# Altium PCB prosthesis.PcbDoc (part 1 of 2)
Units mm, origin at the board's own origin, x right, y up, seen from the top; angles counter-clockwise.
Board outline 54.59 x 41.87 mm, 4 copper layers (Top Layer, Layer 1, Layer 2, Bottom Layer), stack 1.575 mm thick; 80 components, 84 nets, 363 pads, 186 vias.
Unrouted connection lines stored in the file: 115.
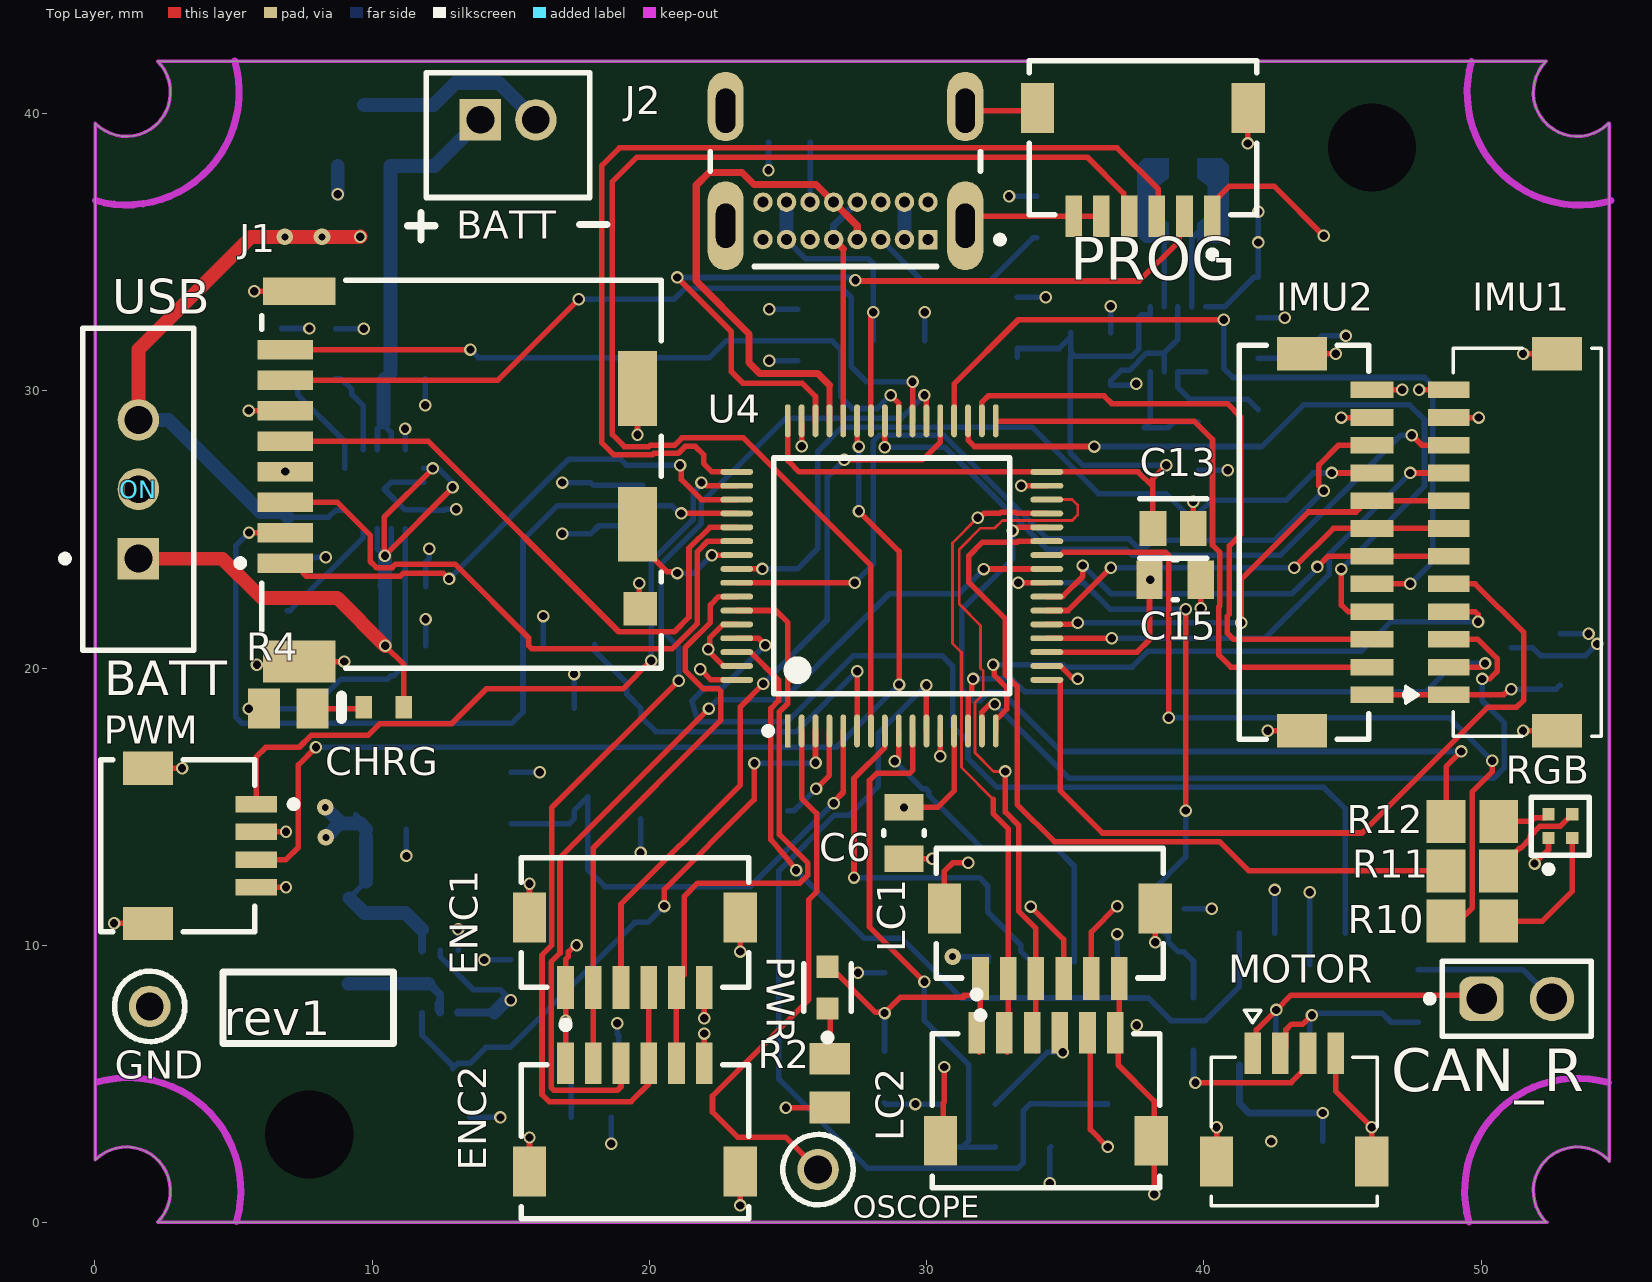
[diagram p0: Top Layer view]
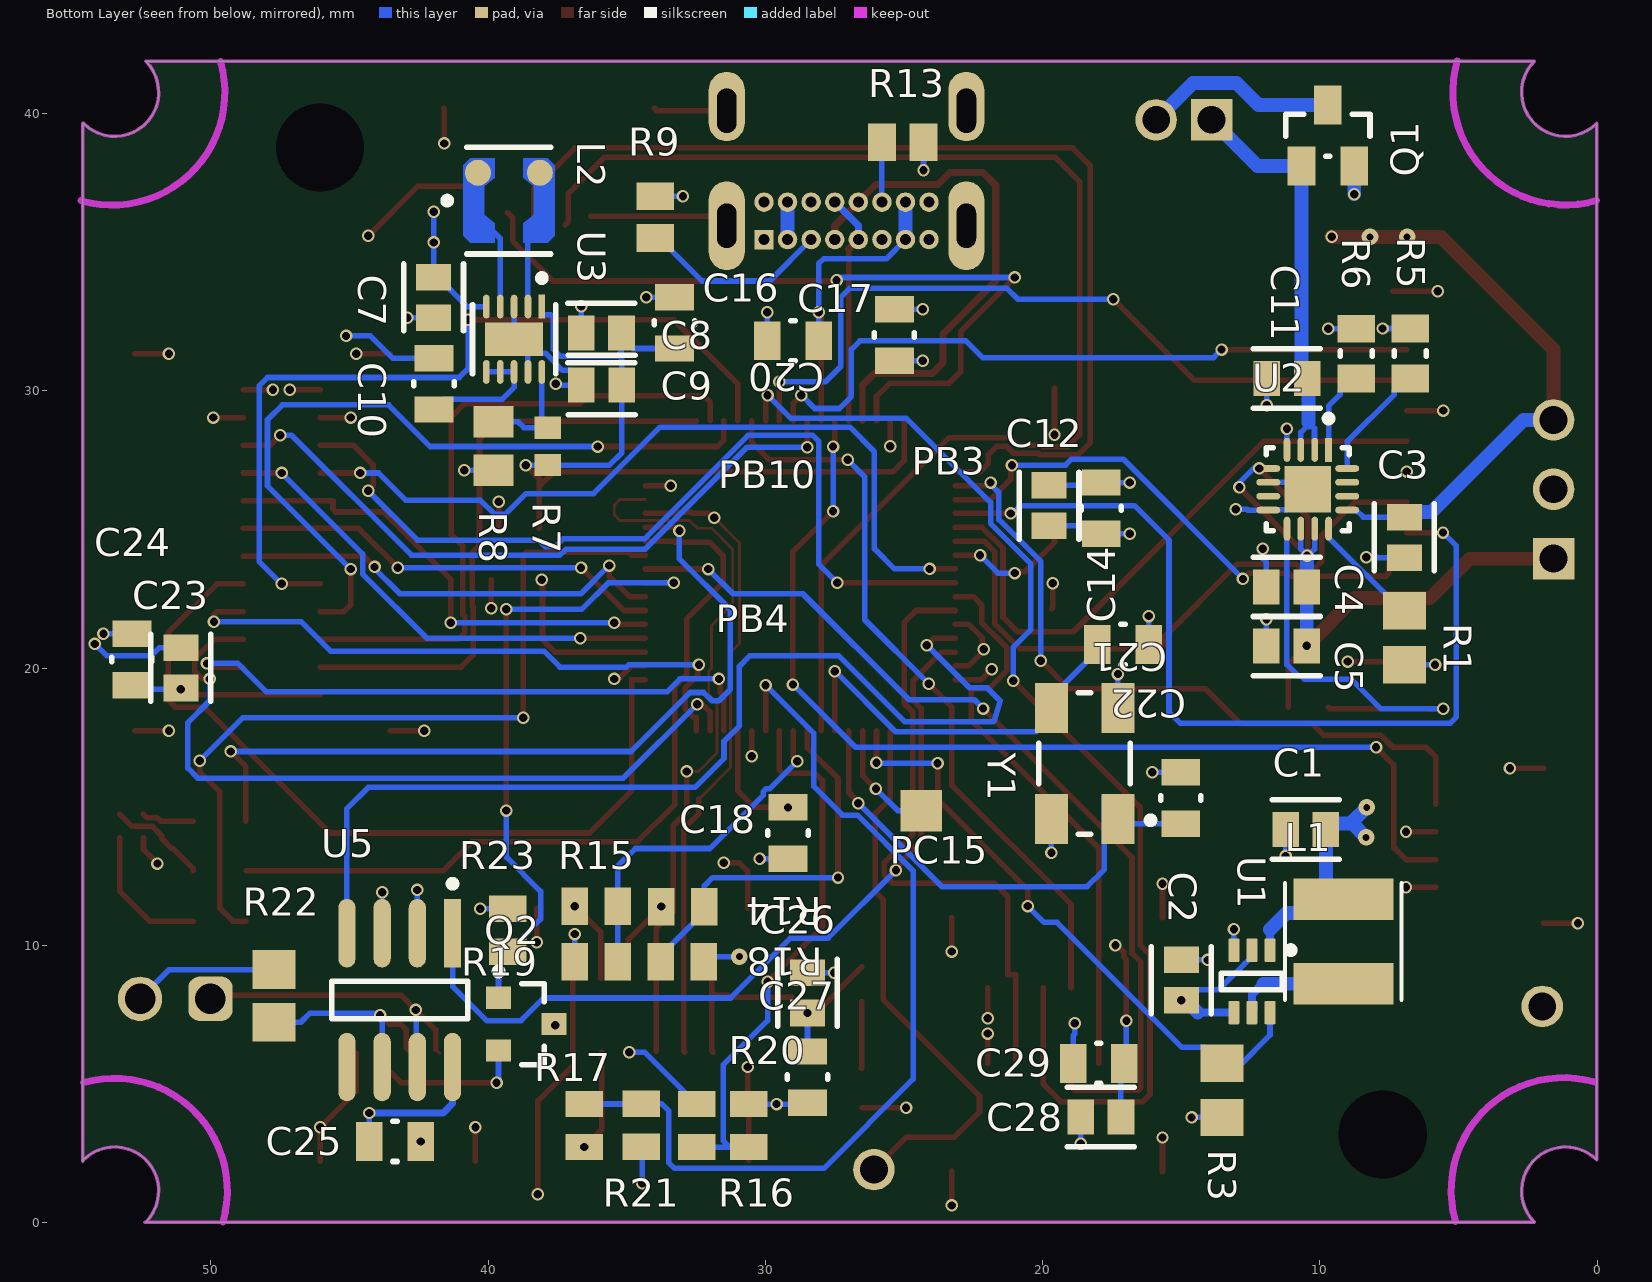
[diagram p1: Bottom Layer view, seen from below]
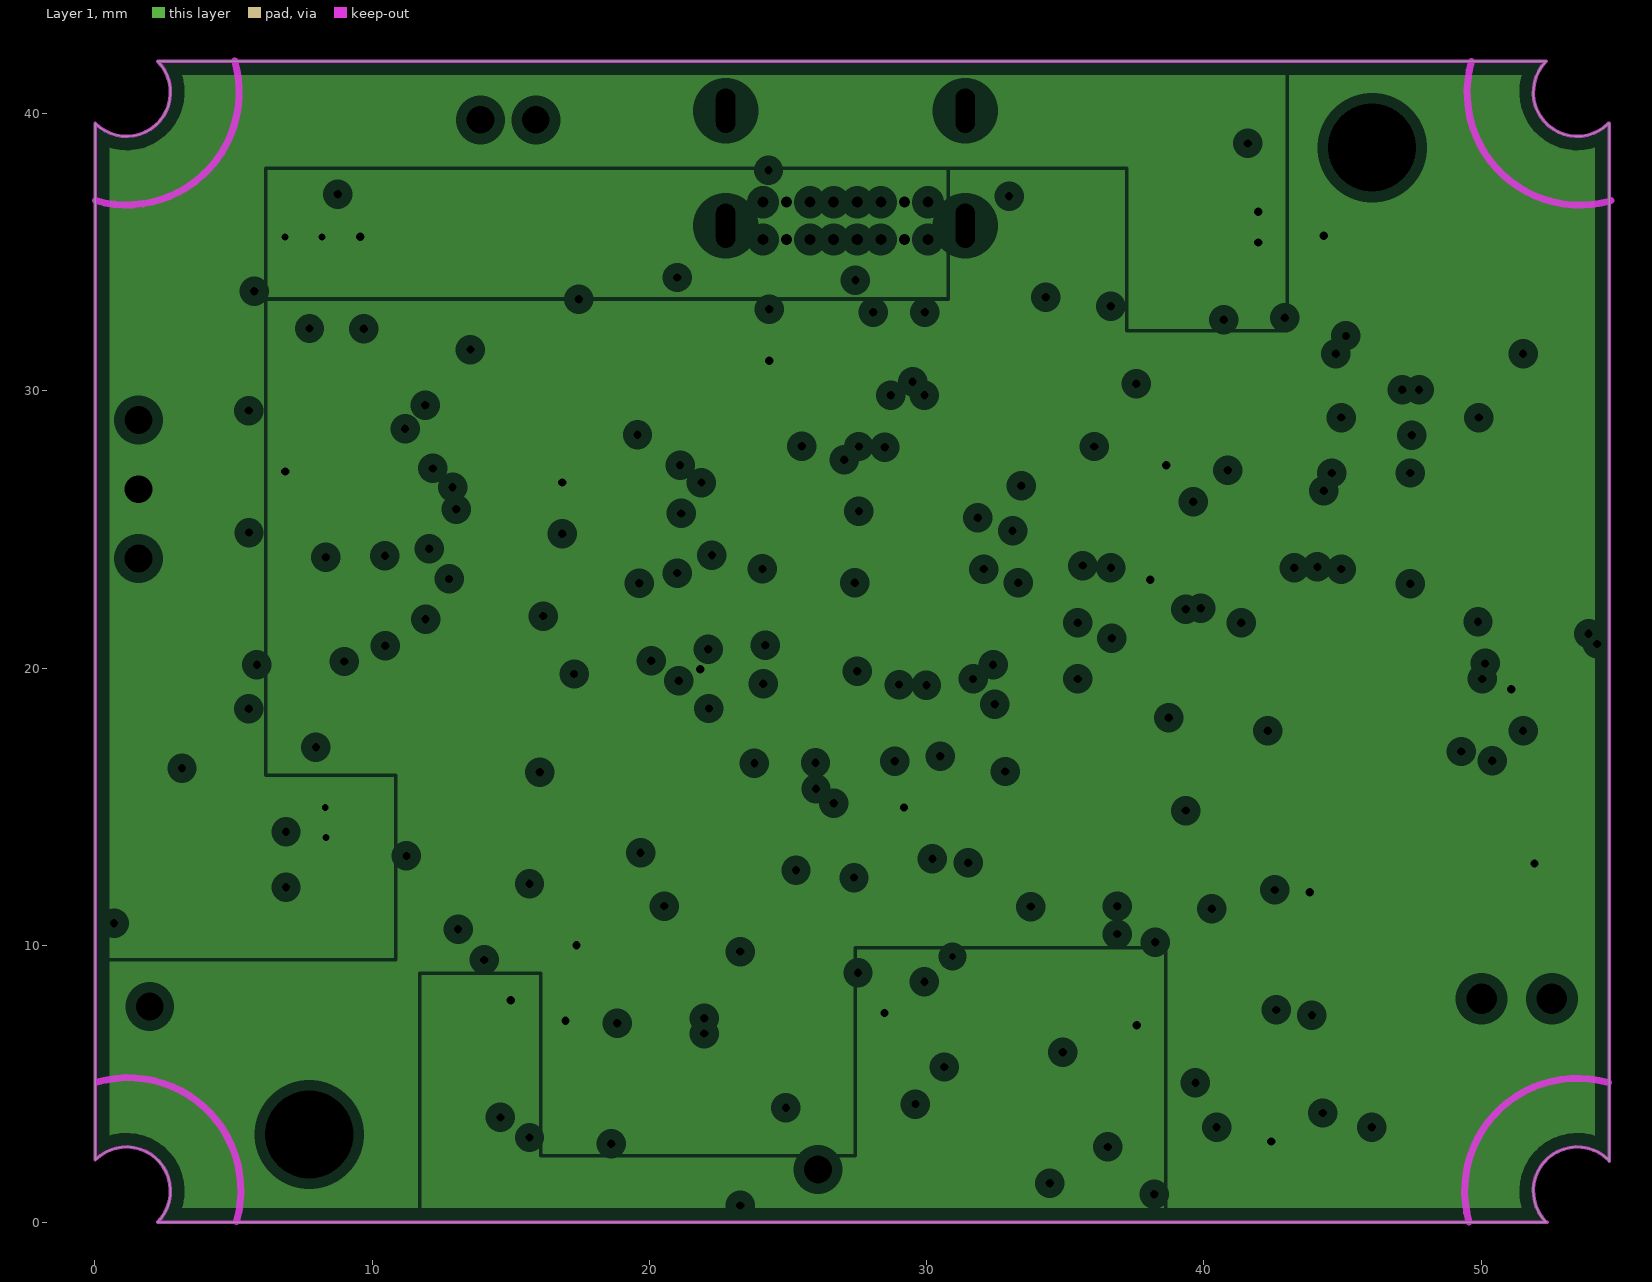
[diagram p2: Layer 1, clearances drawn from the general rule]
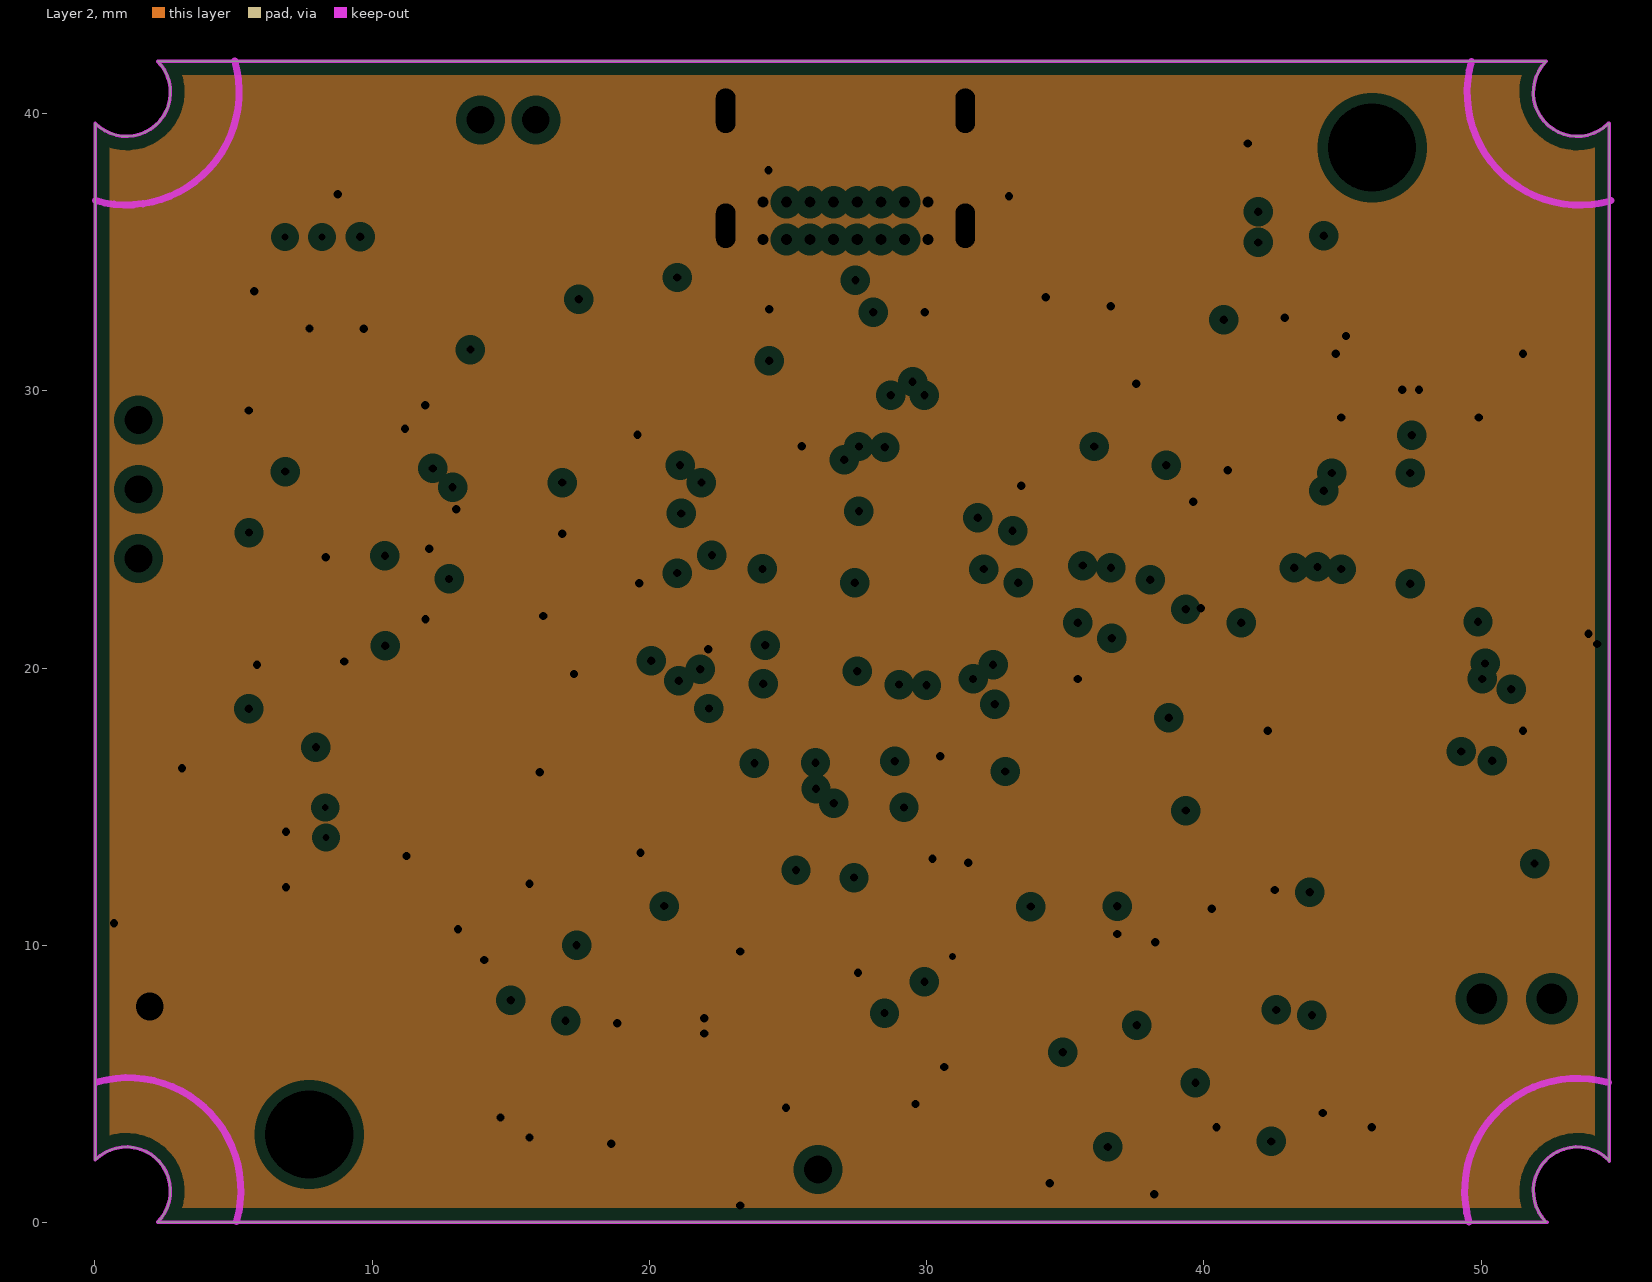
[diagram p3: Layer 2, clearances drawn from the general rule]
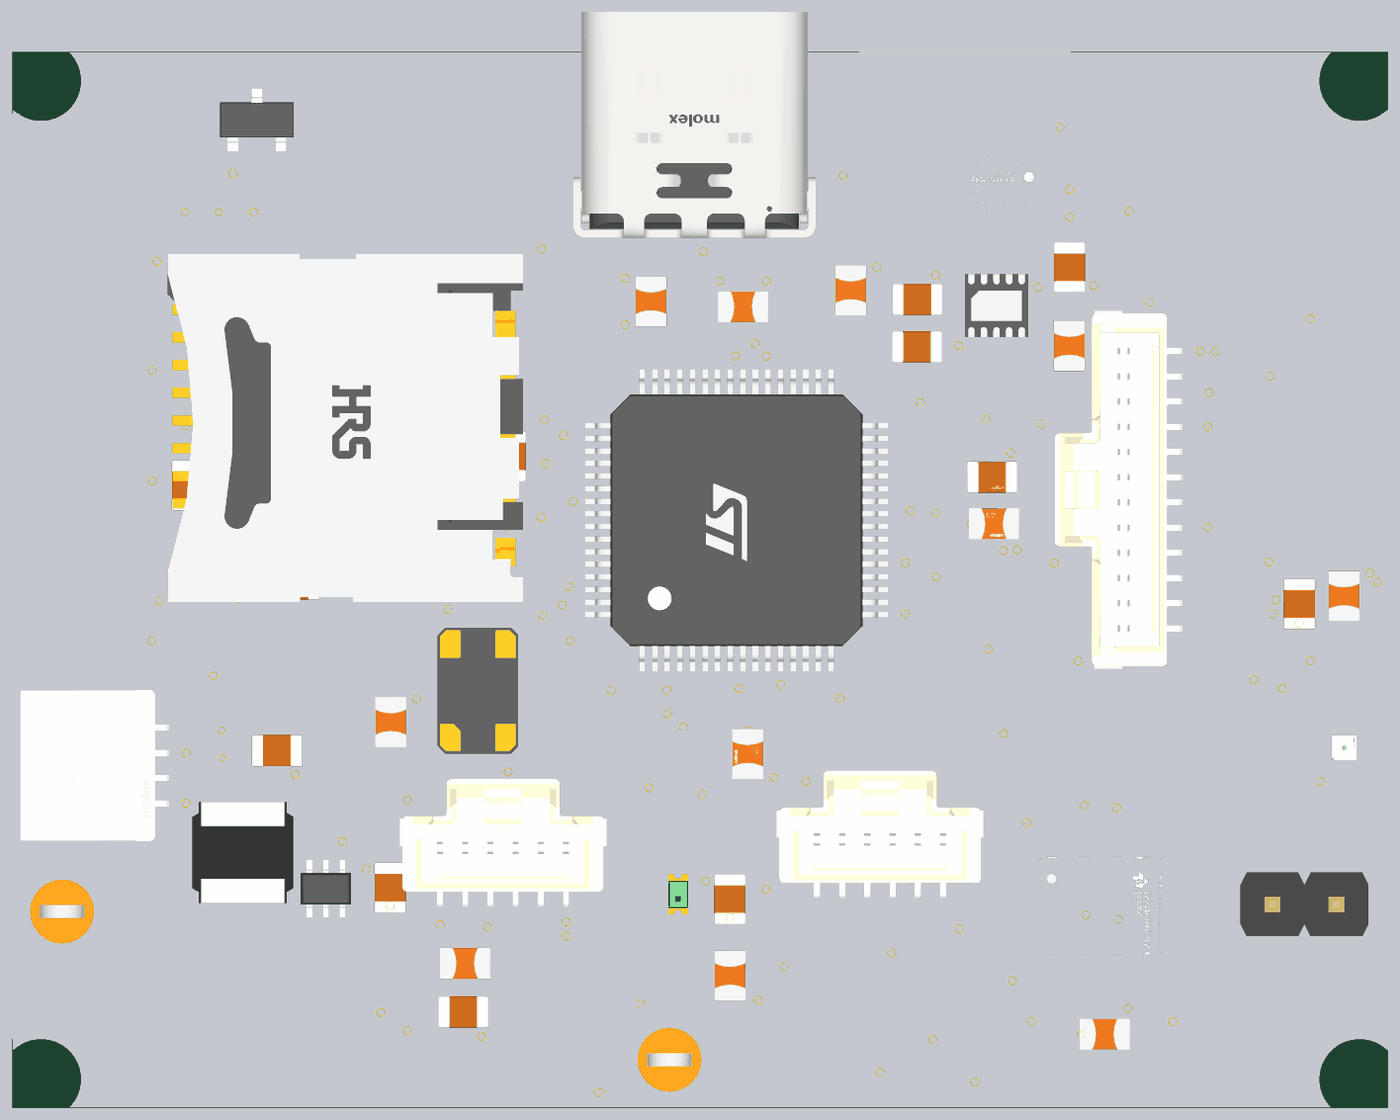
[diagram p5: 3D render of the assembled board from above, using the file's embedded part models]
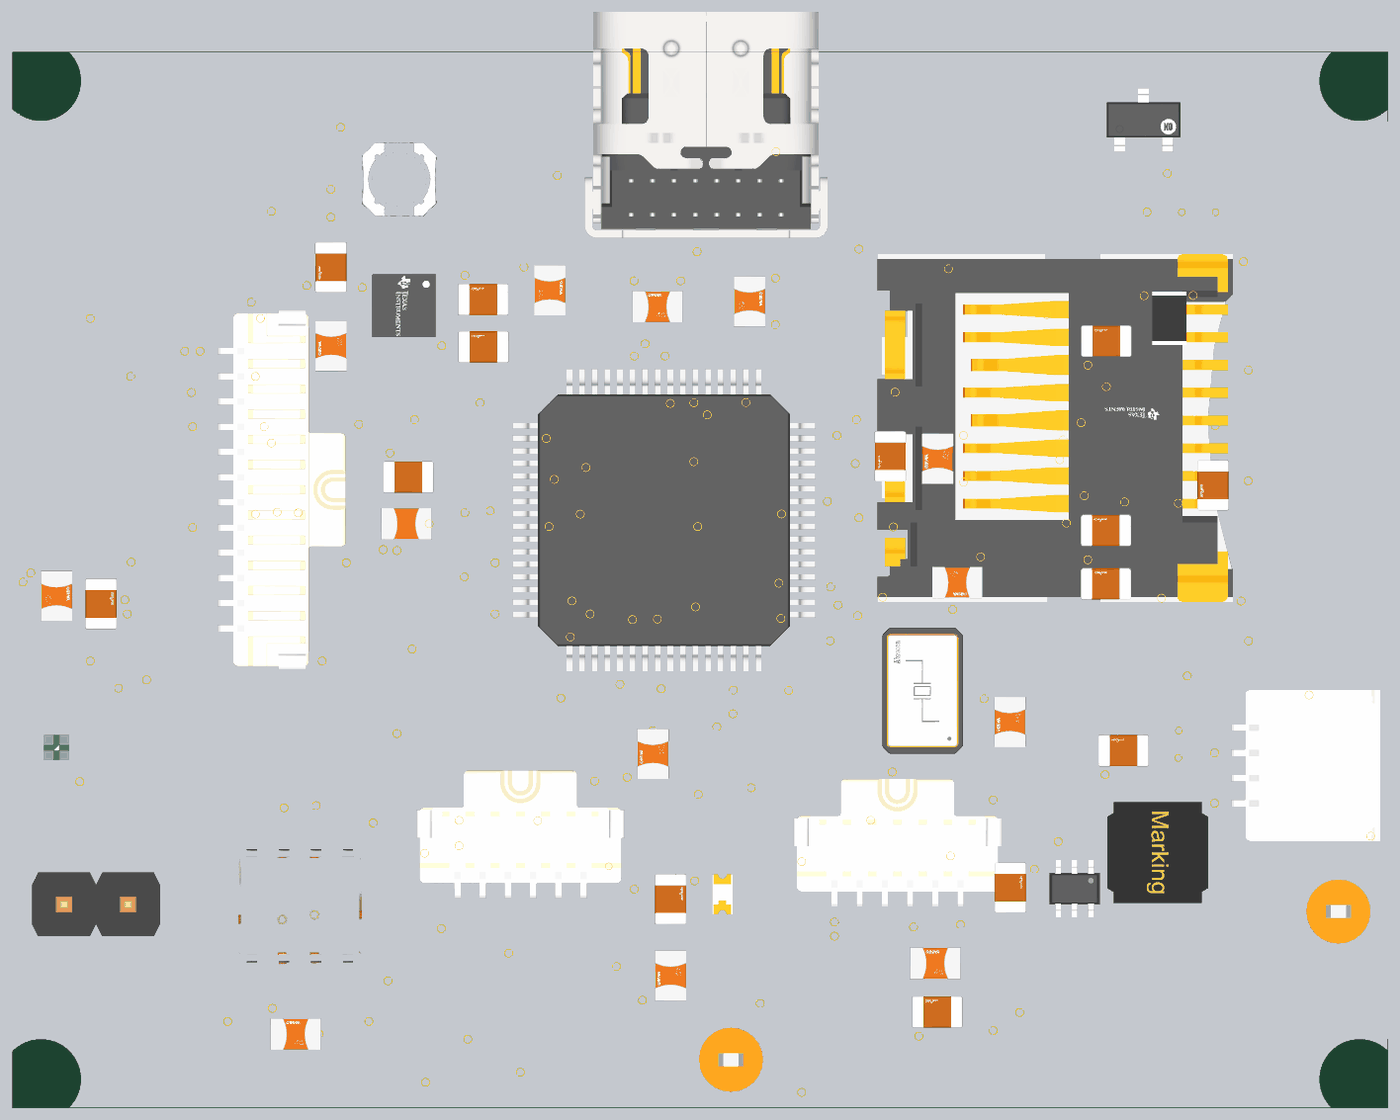
[diagram p6: 3D render of the assembled board from below, using the file's embedded part models]

## Layer stack, top to bottom
Top Solder: solder mask 0.0127, Solder Resist, Dk 3.3
Top Layer: signal copper 0.0178
Dielectric 5: prepreg 0.0711, PP-006, Dk 4.1
Dielectric 1: prepreg 0.0711, PP-006, Dk 4.1
Layer 1: plane copper 0.035, net (Multiple Nets)
Dielectric 2: prepreg 0.0711, PP-006, Dk 4.1
Dielectric1: core 1.0423, FR-4, Dk 4.3
Dielectric 3: prepreg 0.0711, PP-006, Dk 4.1
Layer 2: plane copper 0.035, net GND
Dielectric 4: prepreg 0.0711, PP-006, Dk 4.1
Dielectric 6: prepreg 0.0711, PP-006, Dk 4.1
Bottom Layer: signal copper 0.0178
Bottom Solder: solder mask 0.0127, Solder Resist, Dk 3.3

## Board outline
0.02,2.266 0.02,39.644 ccw(c1.143,40.767) 2.266,41.89 52.344,41.89 ccw(c53.467,40.767) 54.59,39.644 54.61,39.644 54.61,2.211 54.59,2.266 ccw(c53.467,1.143) 52.344,0.02 2.266,0.02 ccw(c1.143,1.143)

## Design rules (kind name [scope] priority, off if disabled: settings)
Clearance [All] p1: gap=0.08 ignorepadtopadclearanceinfootprint=TRUE
DiffPairsRouting [All] p1: maxlimit=0.254 minlimit=0.254 mostfreqgap=0.254 toplayer_minwidth=0.254 toplayer_maxwidth=0.254 toplayer_prefwidth=0.254 bottomlayer_minwidth=0.254 bottomlayer_maxwidth=0.254 bottomlayer_prefwidth=0.254 maxuncoupledlength=12.7
HoleSize [All] p1: absolutevalues=TRUE maxlimit=7.62 minlimit=0.3 maxpercent=80.000 minpercent=20.000
MinimumAnnularRing [All] p1: minimumring=0.07
MinimumSolderMaskSliver [All] p1: minsoldermaskwidth=0.05
PasteMaskExpansion [All] p1: expansion=0.254
PlaneClearance [All] p1: clearance=0.381
PlaneConnect [All] p1: pad.planeconnectstyle=Relief pad.reliefexpansion=0.508 pad.reliefentries=4 pad.reliefconductorwidth=0.254 pad.reliefairgap=0.254 via.planeconnectstyle=Direct via.reliefexpansion=0.508 via.reliefentries=4 via.reliefconductorwidth=0.254 via.reliefairgap=0.254
PolygonConnect [All] p1: thpad.connectstyle=Relief thpad.reliefconductorwidth=0.254 thpad.reliefentries=4 thpad.polygonreliefangle="90 Angle" thpad.airgapwidth=0.254 smdpad.connectstyle=Relief smdpad.reliefconductorwidth=0.254 smdpad.reliefentries=4 smdpad.polygonreliefangle="90 Angle" smdpad.airgapwidth=0.254 via.connectstyle=Direct via.reliefconductorwidth=0.254 via.reliefentries=4 via.polygonreliefangle="90 Angle" via.airgapwidth=0.254
RoutingVias [All] p1: holewidth=0.3 width=0.45 viastyle="Through Hole" minholewidth=0.3 minwidth=0.45 maxholewidth=1 maxwidth=1.5
SMDNeckDown [All] p1: percent=100.000
SilkToSolderMaskClearance SilkscreenOverComponentPads [IsPad] p1: minsilkscreentomaskgap=0.254 clearancetoexposedcopper=TRUE
SolderMaskExpansion [All] p1: expansion=0.254 istentingtop=FALSE
SupplyNets "Schematic Supply Nets_4" [InNet('GND')] p1: voltage=0.000
SupplyNets "Schematic Supply Nets_3" [InNet('Vusb')] p2: voltage=0.000
SupplyNets "Schematic Supply Nets_2" [InNet('V5')] p3: voltage=0.000
SupplyNets "Schematic Supply Nets_1" [InNet('V3.3')] p4: voltage=0.000
SupplyNets "Schematic Supply Nets" [InNet('Vsys')] p5: voltage=0.000
UnRoutedNet [All] p1: checkbadconnections=TRUE
Width [All] p1: maxlimit=0.5 minlimit=0.1 preferedwidth=0.2
22 further rules are at their usual default settings.

## Classes and differential pairs
differential pair D: +D_P -D_N

## Components (designator, comment, footprint, x,y, rotation, side; value= is the part's Value field where it differs from the comment)
BATT "B2B-PH-K-S(LF)(SN)" JST-B2B-PH-K-S_V 14.908,39.221 r0 top (schematic designator BATT1)
C1 "GRM21BR61C106KE15L" FP-GRM21B-0_1-IPC_C 10.512,14.182 r0 bottom
C2 "GRM21BR61C106KE15L" FP-GRM21B-0_1-IPC_C 15.002,8.748 r90 bottom
C3 "GRM21BR61C106KE15L" FP-GRM21B-0_1-IPC_C 6.96,24.714 r270 bottom
C4 "GRM21BR61C106KE15L" FP-GRM21B-0_1-IPC_C 11.201,22.926 r0 bottom
C5 "GRM21BR61C106KE15L" FP-GRM21B-0_1-IPC_C 11.201,20.803 r0 bottom
C6 "CC0805KRX7R7BB104" FP-CC0805-0_85-MFG 29.185,14.05 r270 top value="100 nF"
C7 "GRM21BR61C106KE15L" FP-GRM21B-0_1-IPC_C 41.962,33.368 r270 bottom
C8 "GRM21BR61C106KE15L" FP-GRM21B-0_1-IPC_C 35.917,32.088 r0 bottom
C9 "GRM21BR61C106KE15L" FP-GRM21B-0_1-IPC_C 35.907,30.208 r0 bottom
C10 "CC0805KRX7R7BB104" FP-CC0805-0_85-MFG 41.952,30.251 r270 bottom value="100 nF"
C11 "GRM21BR61C106KE15L" FP-GRM21B-0_1-IPC_C 11.193,30.439 r0 bottom
C12 "GRM21BR61C106KE15L" FP-GRM21B-0_1-IPC_C 19.765,25.86 r270 bottom
C13 "GRM21BR61C106KE15L" FP-GRM21B-0_1-IPC_C 38.89,25.04 r0 top
C14 "CC0805KRX7R7BB104" FP-CC0805-0_85-MFG 17.884,25.766 r270 bottom value="100 nF"
C15 "CC0805KRX7R7BB104" FP-CC0805-0_85-MFG 38.963,23.186 r0 top value="100 nF"
C16 "CC0805KRX7R7BB104" FP-CC0805-0_85-MFG 33.275,32.451 r90 bottom value="100 nF"
C17 "CC0805KRX7R7BB104" FP-CC0805-0_85-MFG 25.348,32.012 r90 bottom value="100 nF"
C18 "CC0805KRX7R7BB104" FP-CC0805-0_85-MFG 29.185,14.05 r270 bottom value="100 nF"
C20 "CC0805KRX7R7BB104" FP-CC0805-0_85-MFG 29.003,31.805 r0 bottom value="100 nF"
C21 "32pF" FP-CC0805-0_85-MFG 15.02,15.315 r270 bottom value="32 pF"
C22 "32pF" FP-CC0805-0_85-MFG 17.104,20.85 r180 bottom value="32 pF"
C23 "GRM21BR61C106KE15L" FP-GRM21B-0_1-IPC_C 51.084,20.008 r90 bottom
C24 "CC0805KRX7R7BB104" FP-CC0805-0_85-MFG 52.847,20.309 r90 bottom value="100 nF"
C25 "CC0805KRX7R7BB104" FP-CC0805-0_85-MFG 43.358,2.93 r0 bottom value="100 nF"
C26 "GRM21BR61C106KE15L" FP-GRM21B-0_1-IPC_C 28.481,8.288 r90 bottom
C27 "CC0805KRX7R7BB104" FP-CC0805-0_85-MFG 28.481,5.25 r270 bottom value="100 nF"
C28 "GRM21BR61C106KE15L" FP-GRM21B-0_1-IPC_C 17.903,3.808 r0 bottom
C29 "CC0805KRX7R7BB104" FP-CC0805-0_85-MFG 17.977,5.744 r0 bottom value="100 nF"
CAN_R "61300211121" 61300211121 51.283,8.075 r0 top (schematic designator J3)
CHRG "TLMS1000-GS08" VISH-TLMS1000_V 10.424,18.588 r180 top
ENC1 "501331-0607" FP-501331-0607-MFG 19.478,10.827 r180 top
ENC2 "501568-0607" FP-501568-0607-MFG 19.478,2.921 r0 top
GND "5003" KSTN-5003 1.981,7.798 r0 top (schematic designator TP1)
IMU1 "2023961207" MOLEX_2023961207 51.384,24.536 r90 top
IMU2 "501331-1207" FP-501331-1207-MFG 43.606,24.536 r270 top
J1 "DM3CS-SF" FP-DM3CS-SF-MFG 13.223,26.987 r270 top
J2 "2137160001" FP-2137160001-MFG 27.073,39.018 r180 top
L1 "74404041047" WE-LQS_4012 9.155,10.142 r270 bottom
L2 "LPS3015-152MRB" FP-LPS3015-MFG 39.25,36.859 r180 bottom
LC1 "501331-0607" FP-501331-0607-MFG 34.442,11.158 r180 top
LC2 "501568-0607" FP-501568-0607-MFG 34.303,4.03 r0 top
MOTOR "2023960407" MOLEX_2023960407 43.256,3.561 r0 top
ON "EG1218" ESWI-EG1218_V 1.575,26.449 r90 top (schematic designator ON1)
OSCOPE "5003" KSTN-5003 26.086,1.915 r0 top (schematic designator OSC)
PROG "501568-0607" FP-501568-0607-MFG 37.801,39.12 r180 top
PWM "501568-0407" FP-501568-0407-MFG 2.996,13.593 r270 top (schematic designator PWM1)
PWR "LTST-C190GKT" FP-LTST-C190GKT-MFG 26.426,8.478 r90 top
Q1 "FDN337N" FP-527AG-MFG 9.714,39.212 r90 bottom
Q2 "2N7002LT3G" ONSC-SOT-23-3-318-08_V 38.624,7.159 r180 bottom
R1 "1.18k" RESC2013X70X40ML20T20 6.948,21.095 r270 bottom
R2 "1.5k" RESC2013X70X40NL20T20 26.51,5.035 r90 top
R3 "47k" RESC2013X70X40ML20T20 13.531,4.769 r90 bottom
R4 "1.5k" RESC2013X70X40NL20T20 6.983,18.539 r0 top
R5 "1.13k" RESC2013X60X35NL10T20 6.743,31.347 r270 bottom
R6 "10k" RESC2013X60X35NL10T20 8.695,31.342 r270 bottom
R7 "1M" RESC1608X55X30NL15T15 37.843,27.994 r270 bottom
R8 "180k" RESC2013X50X40NL20T20 39.804,28.009 r90 bottom
R9 "5.1k" RESC2013X60X40LL20T25 33.973,36.263 r90 bottom
R10 "100" RESC2013X60X40ML20T25 49.686,10.875 r0 top
R11 "100" RESC2013X60X40ML20T25 49.676,12.686 r0 top
R12 "100" RESC2013X60X40ML20T25 49.684,14.476 r0 top
R13 "5.1k" RESC2013X60X40LL20T25 25.048,38.958 r180 bottom
R14 "5.6k" RESC2013X70X40LL20T20 32.978,11.401 r0 bottom
R15 "5.6k" RESC2013X70X40LL20T20 36.098,11.415 r0 bottom
R16 "5.6k" RESC2013X70X40LL20T20 32.48,3.505 r90 bottom
R17 "5.6k" RESC2013X70X40LL20T20 36.53,3.505 r270 bottom
R18 "10k" RESC2013X70X40LL20T20 33.001,9.408 r0 bottom
R19 "10k" RESC2013X70X40LL20T20 36.1,9.408 r180 bottom
R20 "10k" RESC2013X70X40LL20T20 30.597,3.502 r270 bottom
R21 "10k" RESC2013X70X40LL20T20 34.469,3.51 r90 bottom
R22 "120" RESC2013X60X40ML20T25 47.725,8.178 r270 bottom
R23 "10k" RESC2013X70X40LL20T20 39.286,10.541 r270 bottom
RGB "SML-LX0404SIUPGUSB" FP-SML-LX0404SIUPGUSB-MFG 52.852,14.298 r90 top (schematic designator RGB1)
U1 "TPS61222DCKT" DCK0006A_N 12.452,8.703 r270 bottom
U2 "BQ24074RGTR" FP-RGT0016C-IPC_B 10.439,26.449 r270 bottom
U3 "TPS63030DSKT" FP-DSK0010A-IPC_B 39.062,31.86 r270 bottom
U4 "STM32L476RGT3" FP-LQFP64-5W-IPC_C 28.743,23.327 r90 top
U5 "SN65HVD230DR" FP-D0008A-IPC_A 43.187,8.025 r270 bottom
Y1 "ABM3B-48.000MHZ-B2-T" FP-ABM3B-MFG 18.485,16.561 r90 bottom

## Footprints (in the part's own frame and the unit in brackets; to place one, negate y for a bottom-side part, rotate by r counter-clockwise, add the part's x,y. Pads: shape width x height; smd on the part's side, far side on the other; paste and mask are expansions set on the pad)
61300211121 [mm] "Pin Header, pitch 2.54 mm, THT, Vertical, single row, 2p"
  rrect50% 1.6x1.6 hole 1.1: 1(-1.27,0)
  round 1.6 hole 1.1: 2(1.27,0)
  silkscreen extent -3.26,-1.35 2.69,1.35, body extent -2.54,-1.27 2.54,1.27, height 8.57
DCK0006A_N [mm] "SOT23, 6-Leads, Body 2.15x1.4mm, Pitch 0.65mm, IPC Medium Density"
  rrect25% 0.85x0.4 smd: 1(-1.125,0.65) 2(-1.125,0) 3(-1.125,-0.65) 4(1.125,-0.65) 5(1.125,0) 6(1.125,0.65)
  silkscreen extent -1.25,-1.1 0.3,1.52, body extent -1.14,-1 1.14,1, height 0.94
ESWI-EG1218_V [mm] "THD, 3-Leads, Body 11.6x4mm, Pitch 2.5mm"
  rect 1.5x1.5 hole 1: 1(-2.5,0)
  round 1.5 hole 1: 2(0,0) 3(2.5,0)
  silkscreen extent -5.8,-2 5.8,2.77, body extent -5.8,-2 5.8,2, height 7.4
FP-527AG-MFG [mm]
  rect 1.4x1 smd paste+0 mask+0: 1(-1.1,0.95) 2(1.1,0) 3(-1.1,-0.95)
  silkscreen extent -0.76,-1.52 0.76,1.52, body extent -1.25,-1.46 1.25,1.46, height 1.12
FP-501331-0607-MFG [mm]
  rect 0.6x1.55 smd paste+0 mask+0: 1(2.5,2.35) 2(1.5,2.35) 3(0.5,2.35) 4(-0.5,2.35) 5(-1.5,2.35) 6(-2.5,2.35)
  rect 1.2x1.8 smd paste+0 mask+0: 7(-3.8,-0.175) 8(3.8,-0.175)
  silkscreen extent -4.1,-2.33 4.1,3.8, body extent -4.5,-2.43 4.5,3.22, height 0.25
FP-501331-1207-MFG [mm]
  rect 0.6x1.55 smd paste+0 mask+0: 1(5.5,2.45) 2(4.5,2.45) 3(3.5,2.45) 4(2.5,2.45) 5(1.5,2.45) 6(0.5,2.45) 7(-0.5,2.45) 8(-1.5,2.45) 9(-2.5,2.45) 10(-3.5,2.45) 11(-4.5,2.45) 12(-5.5,2.45)
  rect 1.2x1.8 smd paste+0 mask+0: 13(-6.8,-0.075) 14(6.8,-0.075)
  silkscreen extent -7.1,-2.34 7.1,3.92, body extent -7.5,-2.43 7.5,3.32, height 0.25
FP-501568-0407-MFG [mm]
  rect 0.6x1.5 smd paste+0 mask+0: 1(-1.5,2.825) 2(-0.5,2.825) 3(0.5,2.825) 4(1.5,2.825)
  rect 1.2x1.8 smd paste+0 mask+0: 5(-2.8,-1.075) 6(2.8,-1.075)
  silkscreen extent -3.1,-2.77 3.1,4.3, body extent -3.5,-2.88 3.5,3.67, height 0.25
FP-501568-0607-MFG [mm]
  rect 0.6x1.5 smd paste-1000 mask+0: 1(-2.5,2.825) 2(-1.5,2.825) 3(-0.5,2.825) 4(0.5,2.825) 5(1.5,2.825) 6(2.5,2.825)
  rect 1.2x1.8 smd paste-1000 mask+0: 7(-3.8,-1.075) 8(3.8,-1.075)
  silkscreen extent -4.1,-2.78 4.1,4.32
FP-2137160001-MFG [mm]
  rrect100% 1.3x3.2 smd paste-1000 mask+0: 1(-4.32,3.065) 2(4.32,3.065)
  rrect100% 0.7x1.6 hole 1.6 slot 0.7 at 0 deg paste-2539.97 mask+0: 1(-4.32,3.065) 2(4.32,3.065) 3(-4.32,-1.085) 4(4.32,-1.085)
  rrect100% 1.3x3.2 smd far side paste-1000 mask+0: 1(-4.32,3.065) 2(4.32,3.065)
  rrect100% 1.3x2.5 smd paste-1000 mask+0: 3(-4.32,-1.235) 4(4.32,-1.235)
  rrect100% 1.3x2.5 smd far side paste-1000 mask+0: 3(-4.32,-1.235) 4(4.32,-1.235)
  rect 0.7x0.7 hole 0.4 paste-2539.97 mask+0: A1(-2.975,3.565)
  round 0.7 hole 0.4 paste-2539.97 mask+0: A4(-2.125,3.565) A5(-1.275,3.565) A6(-0.425,3.565) A7(0.425,3.565) A8(1.275,3.565) A9(2.125,3.565) A12(2.975,3.565) B1(2.975,2.215) B4(2.125,2.215) B5(1.275,2.215) B6(0.425,2.215) B7(-0.425,2.215) B8(-1.275,2.215) B9(-2.125,2.215) B12(-2.975,2.215)
  silkscreen extent -5.7,0.39 4.87,4.53, body extent -5.07,-4.63 5.07,4.76, height 0.25
FP-ABM3B-MFG [mm]
  rect 1.8x1.2 smd paste+0 mask+0: 1(-2,-1.2) 2(2,-1.2) 3(2,1.2) 4(-2,1.2)
  silkscreen extent -2.55,-2.5 2.55,1.65, body extent -2.5,-1.6 2.5,1.6, height 1.1
FP-CC0805-0_85-MFG [mm]
  rect 0.95x1.4 smd paste+0 mask+0: 1(-0.925,0) 2(0.925,0)
  silkscreen extent -0.08,-0.73 0.07,0.73, body extent -1.6,-1.05 1.6,1.05, height 0.25
FP-D0008A-IPC_A [mm]
  rect 2.469x0.622 smd paste+0 mask+0: 1(-2.414,1.905)
  rrect100% 2.469x0.622 smd paste+0 mask+0: 2(-2.414,0.635) 3(-2.414,-0.635) 4(-2.414,-1.905) 5(2.414,-1.905) 6(2.414,-0.635) 7(2.414,0.635) 8(2.414,1.905)
  silkscreen extent -4.32,-2.45 0.68,2.45, body extent -3,-2.45 3,2.45, height 1.75
FP-DM3CS-SF-MFG [mm]
  rect 0.7x2 smd paste+0 mask+0: 1(3.2,-6.35) 2(2.1,-6.35) 3(1,-6.35) 4(-0.1,-6.35) 5(-1.2,-6.35) 6(-2.3,-6.35) 7(-3.4,-6.35) 8(-4.5,-6.35)
  rect 2.7x1.4 smd paste+0 mask+0: 9(-3.1,6.35) 10(1.8,6.35)
  rect 1.2x1.2 smd paste+0 mask+0: 11(4.85,6.45)
  rect 1x2.6 smd paste+0 mask+0: 12(-6.6,-5.85)
  rect 1.5x2.6 smd paste+0 mask+0: 13(6.75,-5.85)
  silkscreen extent -7,-8.1 7,7.2, body extent -7.2,-7.45 7.6,7.3, height 0.25
FP-DSK0010A-IPC_B [mm]
  rect 0.856x0.242 smd paste+0 mask+0: 1(-1.178,1)
  rrect100% 0.856x0.242 smd paste+0 mask+0: 2(-1.178,0.5) 3(-1.178,0) 4(-1.178,-0.5) 5(-1.178,-1) 6(1.178,-1) 7(1.178,-0.5) 8(1.178,0) 9(1.178,0.5) 10(1.178,1)
  rect 1.2x2.1 smd paste-1000 mask+0: 11(0,0)
  silkscreen extent -2.33,-1.5 1.25,1.5, body extent -1.23,-1.25 1.27,1.25, height 0.8
FP-GRM21B-0_1-IPC_C [mm]
  rect 0.958x1.262 smd paste+0 mask+0: 1(-0.727,0) 2(0.727,0)
  silkscreen extent -1.21,-1.07 1.21,1.08, body extent -1,-0.63 1,0.63, height 1.35
FP-LPS3015-MFG [mm]
  round 0.937 smd paste+0 mask+0: 1(-1.116,1.004) 2(1.116,1.004)
  Top Layer region: -1.65,0 -1.65,1.27 -1.395,1.525 -0.51,1.525 -0.51,0.825 -0.89,0.51 -0.89,-0.51 -0.51,-0.825 -0.51,-1.525 -1.395,-1.525 -1.65,-1.27 -1.65,0
  Top Layer region: 1.65,0 1.65,1.27 1.395,1.525 0.51,1.525 0.51,0.825 0.89,0.51 0.89,-0.51 0.51,-0.825 0.51,-1.525 1.395,-1.525 1.65,-1.27 1.65,0
  silkscreen extent -2.35,-1.93 1.51,1.93, body extent -1.48,-1.48 1.48,1.48, height 1.5
FP-LQFP64-5W-IPC_C [mm]
  rect 1.188x0.212 smd paste+0 mask+0: 1(-5.591,3.75)
  rrect100% 1.188x0.212 smd paste+0 mask+0: 2(-5.591,3.25) 3(-5.591,2.75) 4(-5.591,2.25) 5(-5.591,1.75) 6(-5.591,1.25) 7(-5.591,0.75) 8(-5.591,0.25) 9(-5.591,-0.25) 10(-5.591,-0.75) 11(-5.591,-1.25) 12(-5.591,-1.75) 13(-5.591,-2.25) 14(-5.591,-2.75) 15(-5.591,-3.25) 16(-5.591,-3.75) 33(5.591,-3.75) 34(5.591,-3.25) 35(5.591,-2.75) 36(5.591,-2.25) 37(5.591,-1.75) 38(5.591,-1.25) 39(5.591,-0.75) 40(5.591,-0.25) 41(5.591,0.25) 42(5.591,0.75) 43(5.591,1.25) 44(5.591,1.75) 45(5.591,2.25) 46(5.591,2.75) 47(5.591,3.25) 48(5.591,3.75)
  rrect100% 0.212x1.188 smd paste+0 mask+0: 17(-3.75,-5.591) 18(-3.25,-5.591) 19(-2.75,-5.591) 20(-2.25,-5.591) 21(-1.75,-5.591) 22(-1.25,-5.591) 23(-0.75,-5.591) 24(-0.25,-5.591) 25(0.25,-5.591) 26(0.75,-5.591) 27(1.25,-5.591) 28(1.75,-5.591) 29(2.25,-5.591) 30(2.75,-5.591) 31(3.25,-5.591) 32(3.75,-5.591) 49(3.75,5.591) 50(3.25,5.591) 51(2.75,5.591) 52(2.25,5.591) 53(1.75,5.591) 54(1.25,5.591) 55(0.75,5.591) 56(0.25,5.591) 57(-0.25,5.591) 58(-0.75,5.591) 59(-1.25,5.591) 60(-1.75,5.591) 61(-2.25,5.591) 62(-2.75,5.591) 63(-3.25,5.591) 64(-3.75,5.591)
  silkscreen extent -5.72,-4.25 4.25,4.58, body extent -6,-6 6,6, height 1.6
FP-LTST-C190GKT-MFG [mm]
  rect 0.8x0.8 smd paste+0 mask+0: 1(-0.75,0) 2(0.75,0)
  silkscreen extent -1.92,-0.85 0.85,0.85, body extent -1.25,-0.55 1.25,0.55, height 0.25
FP-RGT0016C-IPC_B [mm]
  rect 0.866x0.239 smd paste+0 mask+0: 1(-1.423,0.75)
  rrect100% 0.866x0.239 smd paste+0 mask+0: 2(-1.423,0.25) 3(-1.423,-0.25) 4(-1.423,-0.75) 9(1.423,-0.75) 10(1.423,-0.25) 11(1.423,0.25) 12(1.423,0.75)
  rrect100% 0.239x0.866 smd paste+0 mask+0: 5(-0.75,-1.423) 6(-0.25,-1.423) 7(0.25,-1.423) 8(0.75,-1.423) 13(0.75,1.423) 14(0.25,1.423) 15(-0.25,1.423) 16(-0.75,1.423)
  rect 1.68x1.68 smd paste-1000 mask+0: 17(0,0)
  silkscreen extent -2.67,-1.5 1.5,1.5, body extent -1.5,-1.5 1.5,1.5, height 1
FP-SML-LX0404SIUPGUSB-MFG [mm]
  rect 0.45x0.45 smd paste+0 mask+0: 1(-0.425,0.425) 2(0.425,0.425) 3(0.425,-0.425) 4(-0.425,-0.425)
  silkscreen extent -1.67,-1.05 1.05,1.05, body extent -0.85,-0.85 0.85,0.85, height 0.25
JST-B2B-PH-K-S_V [mm] "Connector, 2-Leads, Body 5.9x4.5mm, Pitch 2mm"
  rect 1.5x1.5 hole 1: 1(-1,0.55)
  round 1.5 hole 1: 2(1,0.55)
  silkscreen extent -2.95,-2.25 2.95,2.25, body extent -2.95,-2.25 2.95,2.25, height 6
KSTN-5003 [mm] "Test Point, Through Hole, Dia 2.54mm"
  round 1.5 hole 1: 1(0,0)
  silkscreen extent -1.27,-1.27 1.27,1.27, body extent -1.27,-1.27 1.27,1.27, height 4.57
MOLEX_2023960407 [mm]
  rect 0.6x1.5 smd mask+0.076: 1(-1.5,2.55) 2(-0.5,2.55) 3(0.5,2.55) 4(1.5,2.55)
  rect 1.2x1.8 smd mask+0.076: S1(2.8,-1.35) S2(-2.8,-1.35)
  silkscreen extent -3,-2.95 3,4.1
MOLEX_2023961207 [mm]
  rect 0.6x1.5 smd mask+0.076: 1(-5.5,2.55) 2(-4.5,2.55) 3(-3.5,2.55) 4(-2.5,2.55) 5(-1.5,2.55) 6(-0.5,2.55) 7(0.5,2.55) 8(1.5,2.55) 9(2.5,2.55) 10(3.5,2.55) 11(4.5,2.55) 12(5.5,2.55)
  rect 1.2x1.8 smd mask+0.076: S1(6.8,-1.35) S2(-6.8,-1.35)
  silkscreen extent -7,-2.95 7,4.1
ONSC-SOT-23-3-318-08_V [mm] "SOT23, 3-Leads, Body 2.92x1.3mm, Pitch 0.95mm"
  rect 0.9x0.8 smd: 1(-1,0.95) 2(-1,-0.95) 3(1,0)
  silkscreen extent -1.13,-1.46 0.65,2.02, body extent -0.65,-1.46 0.65,1.46, height 1.11
RESC1608X55X30NL15T15 [mm] "Chip Resistor, 2-Leads, Body 1.60x0.80mm, IPC Medium Density"
  rect 0.8x0.95 smd: 1(-0.675,0) 2(0.675,0)
  body extent -0.87,-0.48 0.87,0.48, height 0.55
RESC2013X50X40NL20T20 [mm] "Chip Resistor, 2-Leads, Body 2.00x1.25mm, IPC Medium Density"
  rect 1.15x1.45 smd: 1(-0.875,0) 2(0.875,0)
  body extent -1.1,-0.72 1.1,0.72, height 0.5
RESC2013X60X35NL10T20 [mm] "Chip Resistor, 2-Leads, Body 2.00x1.25mm, IPC Medium Density"
  rect 1x1.35 smd: 1(-0.9,0) 2(0.9,0)
  silkscreen extent -0.1,-0.58 0.1,0.57, body extent -1.05,-0.67 1.05,0.67, height 0.6
RESC2013X60X40LL20T25 [mm] "Chip Resistor, 2-Leads, Body 2.00x1.25mm, IPC High Density"
  rect 1x1.35 smd: 1(-0.75,0) 2(0.75,0)
  body extent -1.1,-0.72 1.1,0.72, height 0.6
RESC2013X60X40ML20T25 [mm] "Chip Resistor, 2-Leads, Body 2.00x1.25mm, IPC Low Density"
  rect 1.4x1.55 smd: 1(-0.95,0) 2(0.95,0)
  body extent -1.1,-0.72 1.1,0.72, height 0.6
RESC2013X70X40LL20T20 [mm] "Chip Resistor, 2-Leads, Body 2.00x1.25mm, IPC High Density"
  rect 0.95x1.35 smd: 1(-0.775,0) 2(0.775,0)
  body extent -1.1,-0.72 1.1,0.72, height 0.7
RESC2013X70X40ML20T20 [mm] "Chip Resistor, 2-Leads, Body 2.00x1.25mm, IPC Low Density"
  rect 1.35x1.55 smd: 1(-0.975,0) 2(0.975,0)
  body extent -1.1,-0.72 1.1,0.72, height 0.7
RESC2013X70X40NL20T20 [mm] "Chip Resistor, 2-Leads, Body 2.00x1.25mm, IPC Medium Density"
  rect 1.15x1.45 smd: 1(-0.875,0) 2(0.875,0)
  body extent -1.1,-0.72 1.1,0.72, height 0.7
VISH-TLMS1000_V [mm] "SMD, 2-Leads, Body 0.8x1.6mm"
  rect 0.6x0.8 smd: 1(-0.725,0) 2(0.725,0)
  silkscreen extent 1.52,-0.4 1.52,0.4, body extent -0.8,-0.4 0.8,0.4, height 0.65
WE-LQS_4012 [mm] "SMD Power Inductor, 2-Leads, body 4x4mm"
  rect 1.5x3.6 smd: 1(-1.525,0) 2(1.525,0)
  silkscreen extent -2.1,-2.1 2.1,2.1, body extent -2,-2 2,2, height 1.19

## Part data
BATT: library part CMP-2000-05162-1, "Male Header, Pitch 2 mm, 1 x 2 Position, Height 6 mm, Tail Length 3.4 mm, -25 to 85 degC, RoHS, Bulk", Manufacturer=JST, Datasheet URL=http://datasheet.octopart.com/B2B-PH-K-S%28LF%29%28SN%29-JST-datasheet-8324864.pdf, Datasheet Version=Nov-08, Manufacturer URL=http://www.jst.com/home2.html, No of Positions=2, Pitch=2mm, Style/Orientation=StraightHeader/Plug, Termination=Crimp, Type=ShroudedHeader
C1 C2 C3 C4 C5 C7 C8 C9 C11 C12 C13 C23 C26 C28: library part CMP-2007-03453-2, "Chip Multilayer Ceramic Capacitors for General Purpose, 0805, 10uF, X5R, 15%, 10%, 16V", Capacitance=10uF, Case Code (Imperial)=0805, Case Code (Metric)=2012, Dielectric=X5R, Max Operating Temperature=85°C, Min Operating Temperature=-55°C, Package Quantity=1, Tolerance=10%, Voltage=16V, Case/Package=0805, Depth=1.25mm, Height=1.25mm, Lead Free="Lead Free", Length=2mm, Material=Ceramic, Mount="Surface Mount", Packaging="Tape and Reel", Radiation Hardening=No, REACH SVHC="No SVHC", Termination=SMD/SMT, Thickness=0.053inch, Voltage Rating=16V, Voltage Rating (DC)=16V, Width=1.25mm
C6 C10 C14 C15 C16 C17 C18 C20 C24 C25 C27 C29: library part CMP-1036-04402-6, "CAP CER 0.1UF 16V X7R 0805", Capacitance="100 nF", Manufacturer=Yageo, Package=CC0805-0.85, Temperature="-30°C to +85°C", Temperature Characteristic=X7R, Temperature Range High=+85°C, Temperature Range Low=-30°C, Tolerance=0.1, Voltage Rating="16 V", Automotive=No, Category=Cap, ComponentLink2Description=Datasheet, ComponentLink2URL=http://www.yageo.com/documents/recent/UPY-GPHC_Y5V_6.3V-to-50V_8.pdf, Device Class L1="Passive Components", Device Class L2=Capacitors, Device Class L3="Ceramic Capacitors", Digikey Description="CAP CER 0.1UF 16V X7R 0805", Footprint Url=http://www.yageo.com/exep/pages/download/literatures/UPY-C_GEN_24.pdf, Height=0.95mm, Ipc Land Pattern Name=CAPC200125X85, Lead Free=Yes, Manufacturer Part Number=CC0805KRX7R7BB104, Material=Ceramic, Mouser Description="Multilayer Ceramic Capacitors MLCC - SMD/SMT 100nF 16V X7R 10%", Octopart=https://octopart.com/cc0805krx7r7bb104-yageo-39467769, RoHS=TRUE
C21 C22: library part CMP-1036-04402-6, "CAP CER 32pF 16V X7R 0805", Capacitance="100 nF", Manufacturer=Yageo, Manufacturer Part Number=CC0805KRX7R7BB104, Package=CC0805-0.85, Temperature="-30°C to +85°C", Temperature Characteristic=X7R, Temperature Range High=+85°C, Temperature Range Low=-30°C, Tolerance=0.1, Voltage Rating="16 V", Automotive=No, Category=Cap, ComponentLink2Description=Datasheet, ComponentLink2URL=http://www.yageo.com/documents/recent/UPY-GPHC_Y5V_6.3V-to-50V_8.pdf, Device Class L1="Passive Components", Device Class L2=Capacitors, Device Class L3="Ceramic Capacitors", Digikey Description="CAP CER 0.1UF 16V X7R 0805", Footprint Url=http://www.yageo.com/exep/pages/download/literatures/UPY-C_GEN_24.pdf, Height=0.95mm, Ipc Land Pattern Name=CAPC200125X85, Lead Free=Yes, Material=Ceramic, Mouser Description="Multilayer Ceramic Capacitors MLCC - SMD/SMT 100nF 16V X7R 10%", Octopart=https://octopart.com/cc0805krx7r7bb104-yageo-39467769, RoHS=TRUE
CAN_R: library part CMP-1712-00002-6, Color=Black, Contact Resistance=20mΩ, Current Rating=3A, Max Operating Temperature=125°C, Min Operating Temperature=-40°C, Operating Supply Voltage=250V, Connector Type="Male Pin", Contact Gender=Male, Contact Material=Copper, Contact Mating Length=5.9944mm, Contact Plating=Gold, Gender=Male, Height=8.94mm, Housing Material=PBT, Lead Free="Lead Free", Lead Pitch=2.54mm, Mount="Through Hole", NexarPartId=20081794, Number of Contacts=2, Number of Pins=2, Number of Positions=2, Number of Rows=1, Orientation=Vertical, Packaging=Bulk, Pitch=2.54mm, REACH SVHC="No SVHC", RoHS=Compliant, Termination="Through Hole", Voltage Rating=250V
CHRG: library part CMP-2000-07254-1, "Low Current LED, 40 mW, 1.8 V, -40 to 100 degC, 2-Pin SMD (0603), RoHS, Tape and Reel", Forward Current If=2mA, Forward Voltage=1.8V, LED Colour=Red, Manufacturer=Vishay, Package Description="2-Pin Surface Mount Device, Body 1.6 x 0.8 mm", Package Reference=TLMS1000, Automotive Qualification Standard=AEC-Q100, Bulb Size=1.6mmx0.8mm, Datasheet URL=https://datasheet.ciiva.com/5798/1698881-5798337.pdf, Datasheet Version="Rev. 1.7, 02/2011", LED Mounting=SMD, Lens Shape=Rectangular, Luminous Intensity=4mcd, Manufacturer URL=http://www.vishay.com/, Mounting Technology=SurfaceMount, MSL=MSL2-1year, Packaging=CutTape, Product Range=-, SVHC=ToBeAdvised, Viewing Angle=80°, Wavelength Typ=636nm
ENC1 LC1: library part CMP-04776-000269-1, "CONN HEADER SMD 6POS 1MM", Color=Natural, Contact Resistance=20mR, Current Rating=1A, Max Operating Temperature=85°C, Max Voltage Rating (AC)=50V, Max Voltage Rating (DC)=5.05kV, Min Operating Temperature=-40°C, Package Quantity=1100, Connector Type="Male Pin", Contact Gender=Male, Contact Material=Bronze, Contact Plating=Tin, Contact Type="Male Pin", Depth=5.07mm, Fastening Type=Detent, Gender=Male, Glow Wire Compliant=Non-compliant, Housing Color=Natural, Housing Material=Nylon, Lead Free="Lead Free", Mount="Surface Mount", Number of Circuits=6, Number of Contacts=6, Number of Positions=6, Number of Rows=1, Orientation=Vertical, Packaging="Tape and Reel", Pitch=1mm, Radiation Hardening=No, RoHS Compliant=Yes, Series=501331, Termination=Solder, Voltage Rating=50V, Voltage Rating (AC)=50V
ENC2 LC2 PROG: library part CMP-04776-000027-1, "CONN HEADER SMD R/A 6POS 1MM", Ambient Temperature Range High=+105°C, Ambient Temperature Range Low=-40°C, Current Rating=1A, Manufacturer=Molex, Temperature="-40°C to +105°C", Voltage Rating=50V, Automotive=No, Category=Conn, ComponentLink2Description=Datasheet, ComponentLink2URL=https://www.molex.com/webdocs/datasheets/pdf/en-us/5015680607_PCB_HEADERS.pdf, Conn Gender=Male, Conn Orientation="Right Angle", Contact Material=Tin,Nickel, Device Class L1=Connectors, Device Class L2="Headers and Wire Housings", Device Class L3=unset, Digikey Description="CONN HEADER SMD R/A 6POS 1MM", Footprint Url=https://www.molex.com/pdm_docs/sd/5015680607_sd.pdf, Height=4.9mm, Lead Free=Yes, Manufacturer Part Number=501568-0607, Mouser Description="Headers & Wire Housings 1.0 WtB 6Ckt R/AWaferAssyEmbsTpPk", Number of Contacts=6, Number of Rows=1, Octopart=https://octopart.com/501568-0607-molex-1389391, Package=501568-0607, Pitch=1mm, RoHS=TRUE, Standoff Height=0.1mm, Temperature Range High=+105°C, Temperature Range Low=-40°C
GND OSCOPE: library part CMP-1672-00009-1, "Test Point, Orange, 1-Pin THD, RoHS", Forward Current="3 A", Forward Voltage="1.08 V", Max Operating Temperature="150 degC", Max Surge Current="80 A", Min Operating Temperature="-65 degC", Package Quantity=500, Peak Reverse Current="600 uA", ComponentLink1Description="Manufacturer URL", ComponentLink1URL=http://www.keyelco.com/, ComponentLink2Description=Datasheet, ComponentLink2URL=http://keyelco.com/userAssets/file/M65p56.pdf, DatasheetVersion=Jun-15, Diameter="5.3 mm", Height="0.25 inch", Length="9.5 mm", Mount="Through Hole", PackageDescription="1-Pin Through Hole Device, Dia 2.54 mm", PackageReference=5003, Packaging=Bulk, Pins=2, Radiation Hardening=No, REACH SVHC="No SVHC", RoHSCompliant=true, Weight="0.01 lb", Width="0.25 inch"
IMU1 MOTOR: Package=None, Availability=Unavailable, Price=None
  IMU1: MP=2023961207
  MOTOR: MP=2023960407
IMU2: library part CMP-04776-000917-1, "CONN HEADER SMD 12POS 1MM", Color=Natural, Contact Resistance=20mR, Current Rating=1A, Flammability Rating="UL94 V-0", Max Operating Temperature=85°C, Max Voltage Rating (AC)=50V, Max Voltage Rating (DC)=5.05kV, Min Operating Temperature=-40°C, Package Quantity=1100, Connector Type=Header, Contact Finish - Mating=TIN, Contact Material=Bronze, Contact Plating=Tin, Contact Shape=Square, Contact Type="Male Pin", Depth=5mm, Fastening Type=Latch, Gender=Male, Glow Wire Compliant=Non-compliant, Housing Color=Natural, Housing Material=Nylon, Insulation Color=Natural, Insulation Material=Nylon, Lead Free="Lead Free", Length=14.24mm, Mount="Surface Mount", Number of Circuits=12, Number of Contacts=12, Number of Positions=12, Number of Rows=1, Orientation=Vertical, Packaging="Tape and Reel", Pitch=1mm, Radiation Hardening=No, RoHS Compliant=Yes, Series=501331, Termination=Solder, Voltage Rating=50V, Voltage Rating (DC)=50V
J1: library part CMP-11597-000003-1, "CONN MICRO SD CARD HINGED TYPE", Contact Resistance=100mR, Current Rating=500mA, Flammability Rating="UL94 V-0", Insulation Resistance=1GR, Max Operating Temperature=85°C, Min Operating Temperature=-25°C, Package Quantity=1, Voltage Rating (AC)=125V, Connector Type=Connector, Contact Material=Gold, Contact Plating=Gold, Depth=1.83mm, Gender=Female, Housing Material=Polymer, Lead Free="Lead Free", Length=14.1mm, Max Current Rating=500mA, Mount="Surface Mount", Number of Contacts=8, Number of Positions=8, Number of Rows=1, Orientation="Right Angle", Packaging="Tape and Reel", Pitch=1.1mm, Radiation Hardening=No, Termination=Solder, Width=13.8mm
J2: library part CMP-00257-115676458-1, "2137160001 Conn USB 2.0 Type C F 16 POS 0.85mm Solder RA Thru-Hole 16 Terminal 1 Port T/R", Max Operating Temperature=85°C, Min Operating Temperature=-30°C, Voltage Rating=30V, Contact Material="Gold, Nickel", Height=3.46mm, NexarPartId=115676458, Number of Contacts=16, Schedule B=8536695050, USB Standard="USB 2.0"
L1: library part CMP-03913-61645198-1, "74404041047 Inductors, Fixed, WE-LQS SMD 4012 4.7uH 1.55A 91mOhms", Ambient Temperature Range High=85°C, Ambient Temperature Range Low=-40°C, Case/Package=Nonstandard, Current Rating=1.55A, DC Resistance (DCR)=91mΩ, Inductance=4.7µH, Inductance Tolerance=20%, Max Operating Temperature=125°C, Saturation Current=1.9A, Self Resonant Frequency=55MHz, Test Frequency=100kHz, Composition=Wirewound, Height=1.2mm, Height - Seated (Max)=1.1938mm, Length=4mm, Min Operating Temperature=-40°C, Mount="Surface Mount", NexarPartId=61645198, Packaging="Tape & Reel (TR)", RoHS=Compliant, Shielding=Shielded, Tolerance=20%, Width=4mm
L2: library part CMP-2000-06574-2, "Fixed Inductors LPS3015 AEC-Q200 1.5uH 1.4A 20% SMD", DC Resistance (DCR)=110mR, Inductance=1.5uH, Inductance Tolerance=20%, Max DC Current=2.1A, Max Operating Temperature=85°C, Min Operating Temperature=-40°C, Package Quantity=1, RMS Current (Irms)=1.1A, Saturation Current=2A, Self Resonant Frequency=110MHz, Test Frequency=100kHz, Core Material=Ferrite, Height=1.4mm, Length=3mm, Packaging="Cut Tape", REACH SVHC="No SVHC", Shielding=Shielded, Termination=SMD/SMT, Tolerance=20%, Weight=0.001411oz, Width=3mm
ON: library part CMP-1696-00002-1, "Slide Switch, 500 V, -20 to 70 degC, 3-Pin THD, RoHS", Case\Package=SOT-23-5, Dropout Voltage="300 mV", Max Input Voltage="8 V", Max Operating Temperature="85 degC", Max Ouput Current="150 mA", Max Power Dissipation="250 mW", Min Input Voltage="4.3 V", Min Operating Temperature="-40 degC", Nominal Output Voltage="3.3 V", Package Quantity=3000, ComponentLink1Description="Manufacturer URL", ComponentLink1URL=http://www.e-switch.ch/en/, ComponentLink2Description=Datasheet, ComponentLink2URL=https://www.e-switch.com/system/asset/product_line/data_sheet/119/EG.pdf, DatasheetVersion=Oct-15, Height="1.3 mm", Length="3 mm", Mount="Surface Mount", Output Current="150 mA", Output Voltage="3.3 V", Outputs=1, PackageDescription="3-Pin Through Hole Device, Body 11.6 x 4 mm, Pitch 2.5 mm", PackageReference=EG1218, Packaging="Tape and Reel", Pins=5, Power Rating="250 mW", Radiation Hardening=No, REACH SVHC="No SVHC", RoHSCompliant=true, Width="1.8 mm"
PWM: library part CMP-04776-000298-1, "CONN HEADER SMD R/A 4POS 1MM", Color=Natural, Current Rating=1A, Max Operating Temperature=85°C, Max Voltage Rating (AC)=50V, Max Voltage Rating (DC)=5.05kV, Min Operating Temperature=-40°C, Package Quantity=1700, Connector Type="Male Pin", Contact Material=Bronze, Contact Plating=Tin, Contact Type="Male Pin", Depth=5.35mm, Fastening Type=Detent, Gender=Male, Glow Wire Compliant=Non-compliant, Housing Color=Natural, Housing Material=Nylon, Lead Free="Lead Free", Length=6mm, Mount="Surface Mount", Number of Circuits=4, Number of Contacts=4, Number of Positions=4, Number of Rows=1, Orientation="Right Angle", Packaging="Tape and Reel", Pitch=1mm, Radiation Hardening=No, RoHS Compliant=Yes, Series=Pico-Clasp, Termination=Solder, Voltage Rating=50V, Voltage Rating (AC)=50V
PWR: library part CMP-22017-000005-2, "LED GREEN CLEAR CHIP SMD", Case Code (Imperial)=0603, Case Code (Metric)=1608, Color=Green, Forward Current=30mA, Forward Voltage=2.1V, Lens Color=Colorless, Max Operating Temperature=85°C, Min Operating Temperature=-55°C, Package Quantity=1, Power Dissipation=100mW, Reverse Voltage=5V, Test Current=10mA, Voltage=2V, Case/Package=0603, Depth=0.8mm, Dominant Wavelength=569nm, Height=0.8mm, Illumination Color=Green, Lead Free="Lead Free", Length=1.6mm, Lens Style=Clear, Lens Transparency=Clear, Luminous Intensity=6mcd, Mount="Surface Mount", Number of Elements=1, Number of LEDs=1, Number of Pins=2, Packaging="Tape and Reel", Power Rating=100mW, Radiation Hardening=No, Viewing Angle=130°, Wavelength=565nm, Width=0.8mm
Q1: library part CMP-2000-06250-2, "MOSFET N-CH 30V 2.2A SSOT3", Case/Package=TO-236-3, Continuous Drain Current (ID)=2.2A, Drain to Source Breakdown Voltage=30V, Drain to Source Resistance=65mR, Gate to Source Voltage (Vgs)=8V, Input Capacitance=300pF, Max Operating Temperature=150°C, Max Power Dissipation=500mW, Min Operating Temperature=-55°C, Package Quantity=1, Threshold Voltage=700mV, Contact Plating=Tin, Current Rating=2.2A, Drain to Source Voltage (Vdss)=30V, Drain-source On Resistance-Max=65mR, Dual Supply Voltage=30V, Element Configuration=Single, Fall Time=4ns, Height=0.94mm, Lead Free="Lead Free", Length=2.92mm, Mount="Surface Mount", Nominal Vgs=700mV, Number of Elements=1, Number of Pins=3, On-State Resistance=65mR, Packaging="Tape and Reel", Polarity=N-CHANNEL, Power Dissipation=500mW, Rds On Max=65mR, REACH SVHC="No SVHC", Rise Time=10ns, RoHS Compliant=Yes, Series=-, Termination=SMD/SMT, Turn-Off Delay Time=17ns, Turn-On Delay Time=4ns, Voltage Rating (DC)=30V, Weight=0.03g, Width=3.05mm
Q2: library part CMP-1058-00782-1, "Small Signal MOSFET, 60 V, 115 mA, N-Channel, 3-Pin SOT-23, Pb-Free, Tape and Reel", Manufacturer="On Semiconductor", Package Type=SOT-23-3, Channel Polarity="N Channel", ComponentLink1Description="Manufacturer URL", ComponentLink1URL=http://www.onsemi.com/, ComponentLink2Description=Datasheet, ComponentLink2URL=http://www.onsemi.com/pub_link/Collateral/2N7002L-D.PDF, ComponentLink3Description="Package Specification", ComponentLink3URL=http://www.onsemi.cn/pub_link/Collateral/318-08.PDF, Configuration=Single, DatasheetVersion="Rev. 7", ID Max (A)=0.115, Mounting Technology="Surface Mount", PackageDescription="3-Pin Small Outline Transistor, Body 2.92 x 1.3 mm, Pitch 0.95 mm", PackageReference=SOT-23-3-318-08, PackageVersion="Rev. AP, 11/2009", Packing="Tape and Reel", PartNumber=2N7002LT3G, RoHS=Pb-Free, V(BR)DSS Min (V)=60, VGS Max (V)=20, VGS(th) Max (V)=2.5
R1: library part CMP-2001-00510-1, Manufacturer=Panasonic, Part Number=ERJ-6ENF1181V
R2 R4: library part CMP-1013-00078-2, Manufacturer=Panasonic, Part Number=ERJ-6GEYJ152V
R3: library part CMP-2001-00421-1, Manufacturer=Panasonic, Part Number=ERJ-6GEYJ473V
R5: library part CMP-2001-00957-1, Manufacturer=Yageo, Part Number=RC0805FR-071K13L
R6: library part CMP-1659-00013-4, "Chip Resistor, 10 KOhm, +/- 1%, 0.125 W, -55 to 155 degC, 0805 (2012 Metric), RoHS, Tape and Reel", Manufacturer=Yageo, Max Operating Temperature="155 degC", Min Operating Temperature="-55 degC", Package Quantity=5000, Voltage Rating="150 V", ComponentLink1Description="Manufacturer URL", ComponentLink1URL=http://www.yageo.com/, ComponentLink2Description=Datasheet, ComponentLink2URL=http://www.yageo.com/documents/recent/PYu-RC_Group_51_RoHS_L_04.pdf, DatasheetVersion="Rev. 4, 02/2016", Height="0.5 mm", Length="2 mm", Mount="Surface Mount", Mounting Technology="Surface Mount", PackageDescription="2-Pin Surface Mounted Device, Body 2 x 1.25 mm", PackageReference=0805, Packaging="Tape and Reel", Pins=2, REACH SVHC="No SVHC", RoHSCompliant=true
R7: library part CMP-2000-00706-1, Manufacturer=Panasonic, Part Number=ERJ-3GEYJ105V
R8: library part CMP-2001-04827-1, Manufacturer=Susumu, Part Number=RG2012N-184-W-T1
R9 R13: library part CMP-2001-00713-1, Manufacturer=Panasonic, Part Number=ERA-6YEB512V
R10 R11 R12: library part CMP-2001-00580-1, Manufacturer=Panasonic, Part Number=ERA6AEB101V
R14 R15 R16 R17 R18 R19 R20 R21 R23: library part CMP-2001-00558-1, Manufacturer=Panasonic, Part Number=ERJ6ENF5601V
R22: library part CMP-2001-00588-1, Manufacturer=Panasonic, Part Number=ERA6AEB121V
RGB: library part CMP-2000-07119-2, "LED RGB CLEAR SMD", Case Code (Imperial)=0404, Case Code (Metric)=1010, Color=Blue, Forward Current=2mA, Forward Voltage=2.73V, Lens Color=Colorless, Max Operating Temperature=85°C, Min Operating Temperature=-40°C, Package Quantity=2000, Power Rating=30mW, Case/Package=0404, Height=0.3mm, Lead Free="Lead Free", Length=1mm, Lens Style=Square, Lens Transparency=Clear, Luminous Intensity=20mcd, Mount="Surface Mount", Number of LEDs=3, Packaging="Tape and Reel", REACH SVHC="No SVHC", Test Current=2mA, Viewing Angle=120°, Wavelength=465nm, Width=1mm
U1: library part CMP-0343-00079-2, "Boost Voltage Converter with 0.7 to 5.5 V Input and 5 V Output, -40 to 85 degC, 6-Pin SC70 (DCK), Green (RoHS & no Sb/Br)", Manufacturer="Texas Instruments", Switching Frequency(Max)(kHz)=2000, Code_JEDEC=MO-203-AB, ComponentLink1Description=Datasheet, ComponentLink1URL=http://www.ti.com/general/docs/lit/getliterature.tsp?genericPartNumber=TPS61222&fileType=pdf, ComponentLink2Description="Package Specification", ComponentLink2URL=http://www.ti.com/litv/pdf/mpds114c, DatasheetVersion=SLVS776, Eco-Plan="Green (RoHS & no Sb/Br)", Mounting Technology="Surface Mount", PackageDescription="6-Pin Plastic Small-Outline Package, 2 x 1.3 mm Body, 0.65 mm Pitch, 2.1 mm Lead Span", PackageReference=DCK0006A, PackageVersion="revG, Jan-2007", PartNumber=TPS61222DCKT, Regulated Outputs(#)=1, SubFamily="Step-Up Regulator", Topology=Boost, Vin(Max)(V)=5.5, Vin(Min)(V)=0.7, Vout(Max)(V)=5, Vout(Min)(V)=5
U2: library part CMP-0321-00220-3, "IC LI-ION CHARGE MGMT 16-QFN", Battery Pack Voltage=4.2V, Case/Package=VQFN, Max Charge Current=1.5A, Max Operating Temperature=125°C, Max Supply Voltage=10.2V, Min Input Voltage=4.3V, Min Operating Temperature=-40°C, Min Supply Voltage=4.35V, Package Quantity=3000, Battery Chemistry=LITHIUM-ION, Contact Plating=Gold, Fault Protection="Over Voltage", Interface=USB, Lead Free="Lead Free", Number of Cells=1, Number of Pins=16, Output Current=1.5A, Output Voltage=4.2V, Packaging="Tape and Reel", Radiation Hardening=No, RoHS Compliant=Yes, Series=-, Weight=0.000808oz
U3: library part CMP-0349-00012-4, "IC REG BCK BST ADJ 900MA 10SON", Frequency=2.4MHz, Max Input Voltage=5.5V, Max Operating Temperature=85°C, Max Output Current=800mA, Min Input Voltage=1.8V, Min Operating Temperature=-40°C, Min Output Voltage=1.2V, Package Quantity=1, Quiescent Current=25uA, Efficiency=96%, Height=0.75mm, Lead Free="Lead Free", Length=2.5mm, Max Output Voltage=5.5V, Min Supply Voltage=1.8V, Number of Outputs=1, Number of Pins=10, Operating Supply Voltage=5.5V, Output Current=800mA, Output Type=Adjustable, Output Voltage=5.5V, Packaging="Tape and Reel", Radiation Hardening=No, REACH SVHC="No SVHC", Switching Frequency=2.4MHz, Synchronous Rectifier=Yes, Termination=SMD/SMT, Topology=Buck-Boost, Width=2.5mm
U4: library part CMP-12105-000133-1, "IC MCU 32BIT 1MB FLASH 64LQFP", Case/Package=LQFP, Frequency=80MHz, Max Operating Temperature=125°C, Min Operating Temperature=-40°C, Core Architecture=ARM, Interface=I2C, Memory Size=1MB, Memory Type=FLASH, Number of I/Os=51, Oscillator Type=Internal, Packaging=Tray, Peripherals="Brown-out Detect/Reset"
U5: library part CMP-0315-00015-3, "IC TRANSCEIVER HALF 1/1 8SOIC", Case/Package=D, Max Operating Temperature=85°C, Max Supply Current=17mA, Max Supply Voltage=3.6V, Min Operating Temperature=-40°C, Min Supply Voltage=3V, Operating Supply Voltage=3.3V, Package Quantity=1, Contact Plating=Gold, Data Rate=1Mbps, Lead Free="Lead Free", Nominal Supply Current=17mA, Number of Drivers=1, Number of I/Os=2, Number of Pins=8, Number of Receive Buffers=1, Number of Receivers=1, Number of Transceivers=1, Number of Transmit Buffers=1, Packaging="Tape and Reel", Radiation Hardening=No, REACH SVHC="No SVHC", Termination=SMD/SMT, Weight=0.002561oz
Y1: library part CMP-27762-010589-1, "Crystal 48MHz ±20ppm 18pF SMD-4 5mm x 3.2mm", Case/Package=SMD/SMT, ESR (Equivalent Series Resistance)=50R, Frequency=48MHz, Frequency Stability=50ppm, Frequency Tolerance=20ppm, Load Capacitance=18pF, Max Operating Temperature=70°C, Min Operating Temperature=-20°C, Operating Frequency="48 MHz", Package Quantity=1000, Resistor Type=Ceramic, Depth=3.2mm, Height=0.043inch, Lead Free="Lead Free", Length=5mm, Mount="Surface Mount", Number of Pins=4, Packaging="Tape and Reel", REACH SVHC="No SVHC", Series=ABM3B, Series Resistance=50R, Termination=SMD/SMT, Tolerance=20ppm, Width=3.2mm

## Free pads (board coordinates)
  round 0 hole 3.175 unplated: 2(7.735,3.183) 2(46.068,38.768)
  rect 1.5x1.5 smd far side: 5(24.384,14.861)

## Via types
v1: diameter 0.45, hole 0.3, Top Layer to Bottom Layer, 181 vias
v2: diameter 0.6/0.6 (per signal layer), hole 0.25, Top Layer to Bottom Layer, 5 vias

## Nets (pads, with @x,y where several pads share a name; then routed paths per layer and width w, separated by ;. In a path a pad name is that pad's centre, name@x,y a point inside that pad or via, vN(x,y) a via of type N, cw(c..) or ccw(c..) an arc to the next point about the centre after c; other vN are vias at no path point)
BLU: R11.1 U4.27 | length 29.2
  Top Layer w0.2: U4.27@34.334,24.577 33.3,24.577 33.267,24.544 32.014,24.544 31.521,24.052 31.521,23.091 32.837,21.775 32.837,19.768 33.262,19.343 33.262,15.088 34.609,13.741 40.564,13.741 41.619,12.686 R11.1@48.726,12.686
CAN_RX: U4.61 U5.4 | length 38.1
  Top Layer w0.2: U4.61@23.152,21.077 23.932,21.077 v1(24.181,20.828)
  Bottom Layer w0.2: v1(24.181,20.828) 22.644,19.291 22.002,19.291 21.532,18.821 21.742,18.101 21.784,18.059 24.968,18.059 27.356,20.447 30.556,20.447 30.937,20.066 30.937,17.917 31.492,17.362 31.492,16.743 32.537,15.697 44.323,15.697 45.092,14.929 U5.4@45.092,10.439
CAN_TX: U4.62 U5.1 | length 29.9
  Top Layer w0.2: U4.62@23.152,20.577 23.647,20.577 24.663,19.561 24.663,18.83 24.384,18.55 24.384,13.818 24.387,13.815 24.902,13.207 v1(25.29,12.709)
  Bottom Layer w0.2: v1(25.29,12.709) 27.737,10.262 29.095,10.262 31.254,8.103 37.998,8.103 38.811,7.29 40.056,7.29 41.282,8.516 U5.1@41.282,10.439
CHG: R4.1 U2.9 | length 11.8
  Top Layer w0.2: v1(5.548,18.539) 5.548,18.542 6.108,18.542 R4.1@6.108,18.539
  Bottom Layer w0.2: v1(5.548,18.539) 7.815,18.539 8.87,19.594 10.556,19.594 10.689,19.728 10.792,19.728 11.189,20.125 U2.9@11.189,25.026
D_N: J2.A7 J2.B7 U4.44 | length 8.4
  Top Layer w0.212: U4.44@26.993,28.918 26.993,35.108
  Top Layer w0.254: J2.A7@26.648,35.453 26.993,35.108
  Bottom Layer w0.254: J2.A7@26.648,35.453 26.648,35.953 J2.B7@27.498,36.803
D_P: J2.A6 J2.B6 U4.45 | length 19
  Top Layer w0.212: U4.45@26.493,28.918 26.493,30.201
  Top Layer w0.254: 26.493,30.201 26.061,30.632 23.978,30.632 23.597,31.013 23.597,32.055 21.692,33.96 21.692,37.414 22.149,37.871 23.343,37.871 23.774,37.44 26.011,37.44 J2.B6@26.648,36.803 27.498,35.953 J2.A6@27.498,35.453
Encoder0_CS: ENC1.3 U4.37 | length 26.9
  Top Layer w0.2: ENC1.3@18.979,8.477 18.979,11.486 23.28,15.787 23.28,18.607 v1(24.105,19.431) ; v1(27.026,27.508) 29.845,27.508 30.493,28.156 U4.37@30.493,28.918
  Bottom Layer w0.2: v1(24.105,19.431) 26.416,21.742 26.416,26.899 v1(27.026,27.508)
Encoder1_CS: ENC2.3 U4.25 | length 33.8
  Top Layer w0.2: ENC2.3@18.979,5.746 18.979,4.902 18.852,4.775 16.561,4.775 16.459,4.877 16.459,9.399 16.779,9.719 16.779,13.172 v1(22.149,18.542) ; v1(32.064,23.571) 32.067,23.574 34.332,23.574 U4.25@34.334,23.577
  Bottom Layer w0.2: v1(22.149,18.542) 22.468,18.861 24.83,18.861 28.651,22.682 31.175,22.682 v1(32.064,23.571)
Encoder_CLK: ENC1.5 ENC2.5 U4.59 | length 22.8
  Top Layer w0.2: ENC2.5@20.979,5.746 ENC1.5@20.979,8.477 20.979,8.941 21.26,8.941 21.26,11.76 21.742,12.243 25.425,12.243 25.715,12.533 25.715,12.97 24.687,13.997 24.687,18.426 24.994,18.733 24.994,21.641 24.558,22.077 U4.59@23.152,22.077
Encoder_D: ENC1.4 ENC2.4 U4.38 | length 42.6
  Top Layer w0.2: ENC1.4@19.979,8.477 ENC2.4@19.979,5.746 19.979,5.004 19.344,4.369 16.383,4.369 16.129,4.623 16.129,9.652 16.479,10.002 16.479,14.962 v1(21.056,19.54) ; v1(29.921,29.845) 29.993,29.773 U4.38@29.993,28.918
  Bottom Layer w0.2: v1(21.056,19.54) 21.056,20.754 20.423,21.387 20.423,23.761 21.879,25.216 21.879,25.972 24.913,29.007 29.083,29.007 v1(29.921,29.845)
Encoder_Prog: ENC1.2 ENC2.2 U4.58 | length 20.7
  Top Layer w0.2: ENC2.2@17.979,5.746 ENC1.2@17.979,8.477 17.979,13.522 22.581,18.124 22.581,19.163 22.492,19.252 21.946,19.252 21.288,19.91 21.288,20.734 22.2,21.645 22.2,22.276 22.5,22.577 U4.58@23.152,22.577